# Altium PCB SIC18102  V1 8电极6005_20180920.PcbDoc (part 2 of 3)
Units mm, origin at the board's own origin, x right, y up, seen from the top; angles counter-clockwise.
Board outline 116 x 63 mm, 2 copper layers (Top Layer, Bottom Layer); 179 components, 127 nets, 387 pads, 294 vias.
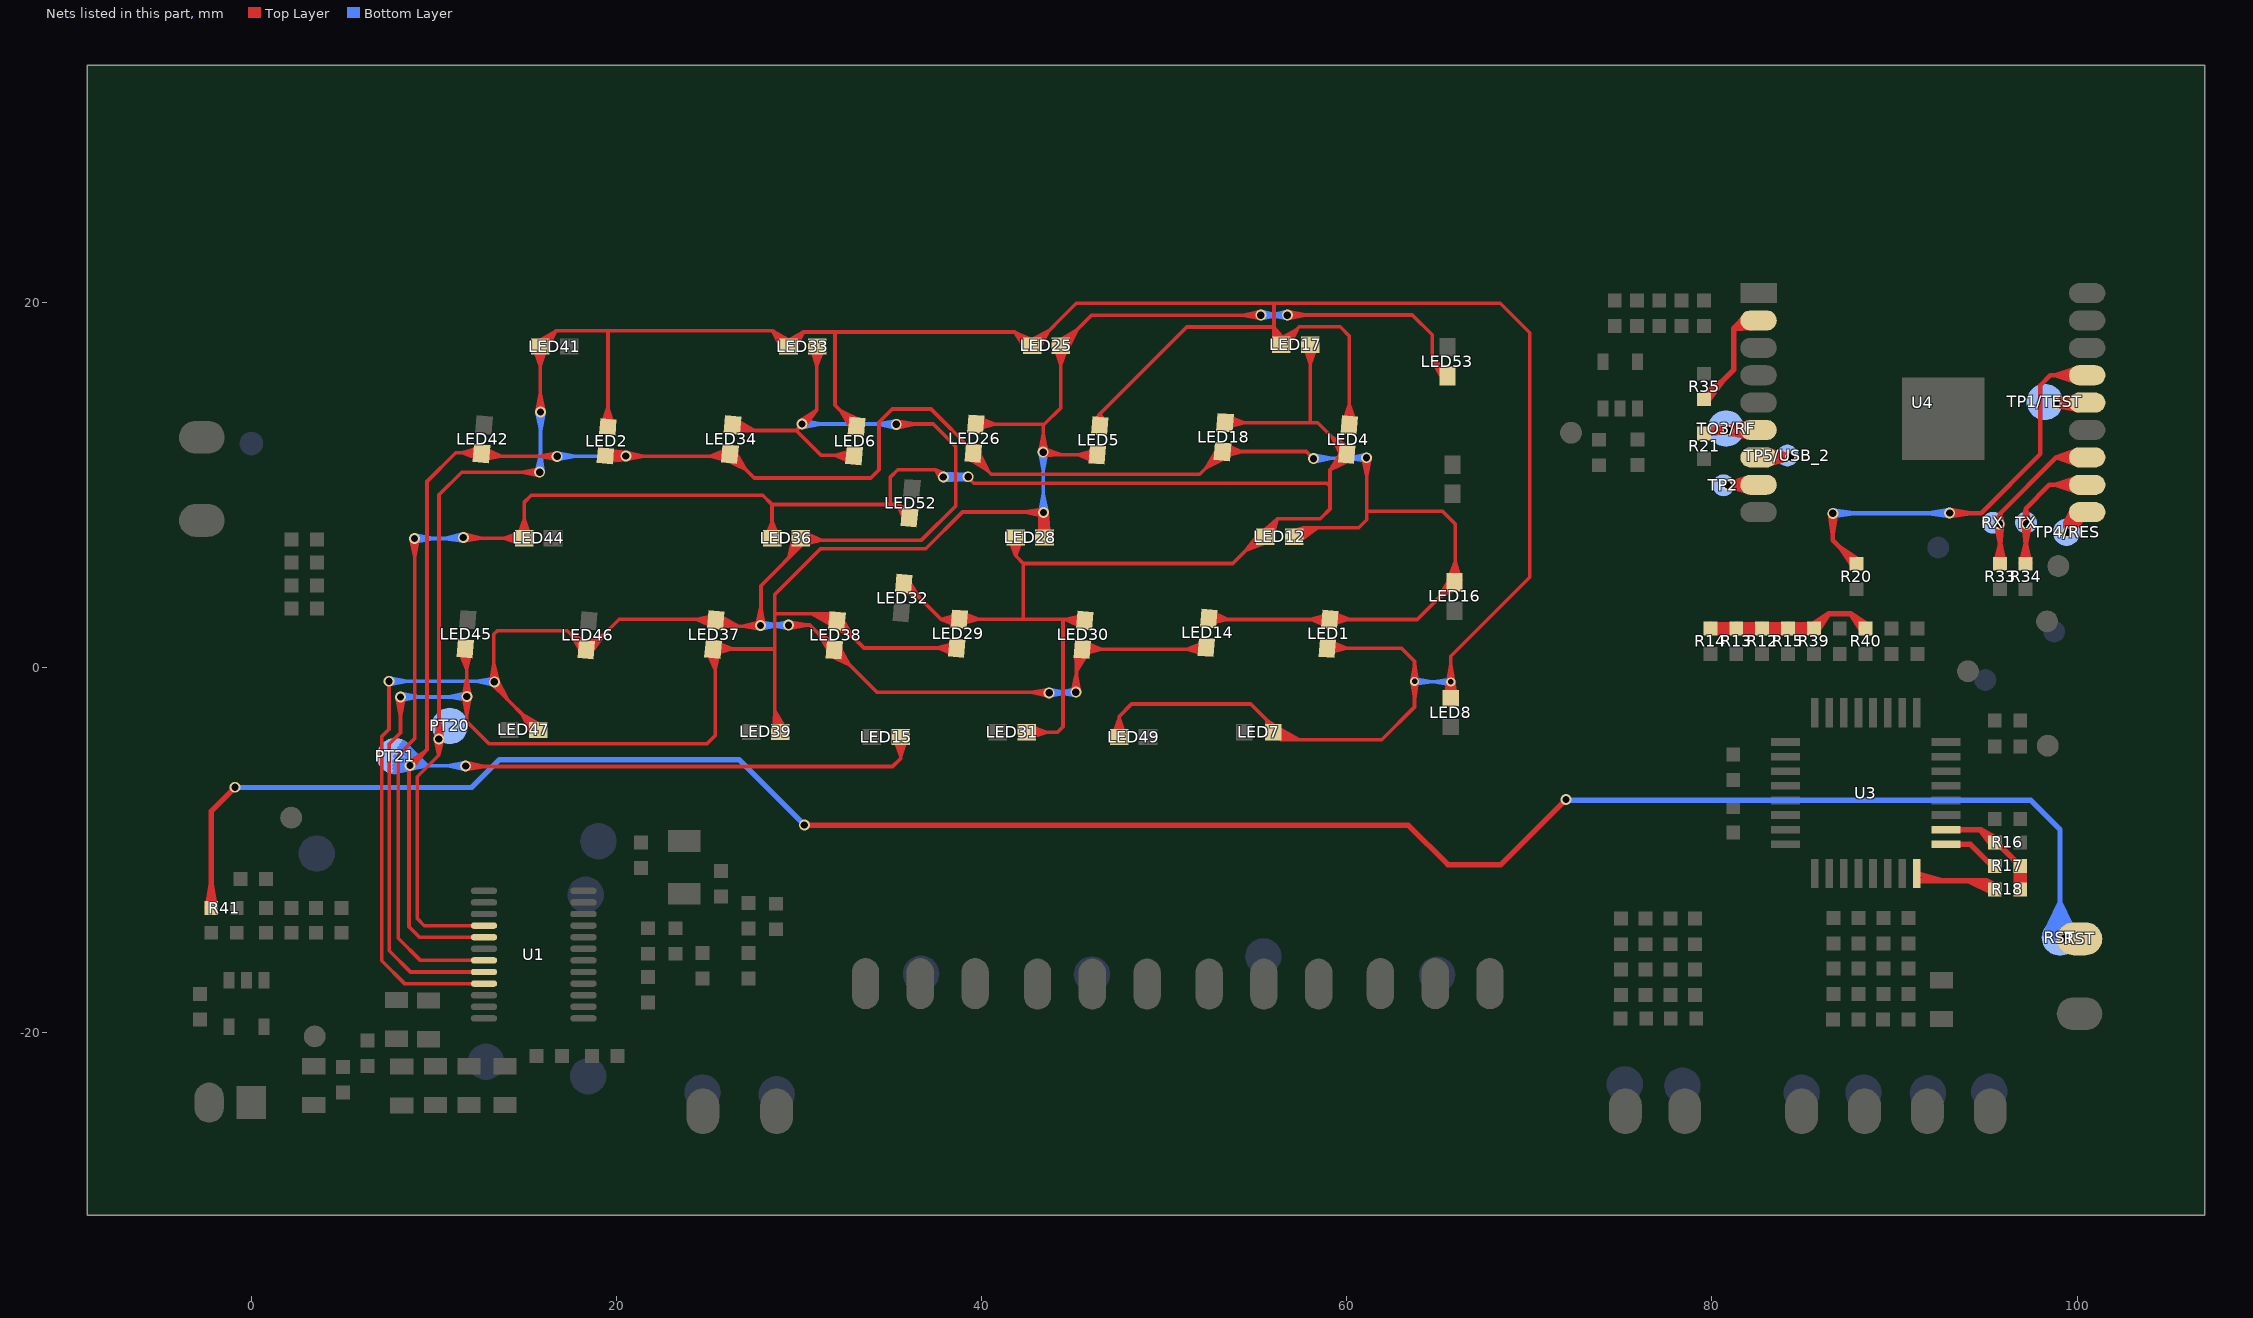
[diagram p2: the nets of this part, all layers, seen from the top]

## Via types
v1: diameter 0.6, hole 0.4, Top Layer to Bottom Layer, 288 vias
v2: diameter 0.8, hole 0.5, Top Layer to Bottom Layer, 4 vias
v3: diameter 0.5, hole 0.3, Top Layer to Bottom Layer, 2 vias

## Nets (pads, with @x,y where several pads share a name; then routed paths per layer and width w, separated by ;. In a path a pad name is that pad's centre, name@x,y a point inside that pad or via, vN(x,y) a via of type N, cw(c..) or ccw(c..) an arc to the next point about the centre after c; other vN are vias at no path point) (continued)
NetR12_2: R12.2 R13.2 R14.2 R15.2 R39.2 R40.1 | length 71.4
  Top Layer w0.3: R14.2@79.892,1.899 R13.2@81.179,1.922 ; R14.2@79.892,2.359 R13.2@81.179,2.336 ; R14.2@79.929,1.899 81.19,2.129 R14.2@79.929,2.359 ; R14.2@79.966,1.905 R13.2@81.179,2.336 ; R14.2@79.966,2.353 R13.2@81.179,1.922 ; R13.2@81.306,1.899 80.046,2.129 R13.2@81.306,2.359 ; R13.2@81.31,1.899 R12.2@82.597,1.922 ; R13.2@81.31,2.359 R12.2@82.597,2.336 ; R13.2@81.347,1.899 82.608,2.129 R13.2@81.347,2.359 ; R13.2@81.384,1.905 R12.2@82.597,2.336 ; R13.2@81.384,2.353 R12.2@82.597,1.922 ; R12.2@82.724,1.899 81.463,2.129 R12.2@82.724,2.359 ; R12.2@82.765,1.899 84.025,2.129 R12.2@82.765,2.359 ; R15.2@84.105,1.905 R12.2@82.892,2.336 ; R15.2@84.105,2.353 R12.2@82.892,1.922 ; R15.2@84.142,1.899 82.881,2.129 R15.2@84.142,2.359 ; R15.2@84.146,1.899 R39.2@85.433,1.922 ; R15.2@84.146,2.359 R39.2@85.433,2.336 ; R15.2@84.179,1.899 R12.2@82.892,1.922 ; R15.2@84.179,2.359 R12.2@82.892,2.336 ; R15.2@84.22,1.905 R39.2@85.433,2.336 ; R15.2@84.22,2.353 R39.2@85.433,1.922 ; R39.2@85.434,2.308 86.391,2.94 ; R39.2@85.56,1.899 R15.2@84.299,2.129 ; R39.2@85.56,2.359 R15.2@84.299,2.129 ; R39.2@85.759,1.983 86.391,2.94 ; R40.1@88.237,1.983 87.605,2.94 ; R40.1@88.562,2.308 87.605,2.94 ; R14.2@79.909,2.129 R39.2@85.58,2.129 ; R14.2@79.909,2.129 R13.2@81.179,1.922 ; R14.2@79.909,2.129 R13.2@81.179,2.336 ; R12.2@82.597,1.922 R13.2@81.327,2.129 R12.2@82.597,2.336 ; R12.2@82.892,1.922 R15.2@84.162,2.129 ; R12.2@82.892,2.336 R15.2@84.162,2.129 ; R15.2@84.162,2.129 R39.2@85.433,1.922 ; R15.2@84.162,2.129 R39.2@85.433,2.336 ; R15.2@84.162,2.129 R39.2@85.443,2.129 ; R15.2@84.299,2.129 R39.2@85.58,2.129 ; R39.2@85.443,2.129 84.183,2.359 R39.2@85.443,2.129 ; R39.2@85.443,2.129 84.183,1.899 R39.2@85.443,2.129 ; R39.2@85.58,2.129 86.391,2.94 ; 86.391,2.94 87.605,2.94 ; 87.605,2.94 R40.1@88.416,2.129 87.605,2.94
NetR14_1: 
NetR16_1: R16.1 R17.1 R18.2 U3.26 | length 24.4
  Top Layer w0.3: U3.26@92.82,-8.88 94.7,-8.88 ; U3.26@93.41,-8.88 94.52,-8.88 ; R16.1@95.315,-9.727 94.7,-8.88 ; R16.1@95.39,-9.57 94.7,-8.88 ; R16.1@95.619,-9.382 94.7,-8.88 ; R18.2@96.653,-12.166 R17.1@96.653,-10.879 ; R18.2@96.653,-12.124 R17.1@96.883,-10.864 ; R18.2@96.661,-12.084 R17.1@97.113,-10.879 ; R18.2@97.106,-12.084 R17.1@96.653,-10.879 ; R18.2@97.113,-12.166 R17.1@97.113,-10.879 ; R18.2@97.113,-12.124 R17.1@96.883,-10.864 ; 94.7,-8.88 R16.1@95.486,-9.571 95.596,-9.571 R17.1@96.883,-10.858 R18.2@96.883,-12.145 ; R17.1@96.653,-10.879 96.883,-12.139 R17.1@97.113,-10.879 ; R17.1@96.653,-10.879 R18.2@96.883,-12.145 ; R18.2@96.883,-12.145 R17.1@96.883,-10.864 ; R18.2@96.883,-12.145 R17.1@97.113,-10.879
NetR17_2: R17.2 U3.25 | length 4.1
  Top Layer w0.3: U3.25@92.82,-9.68 94.15,-9.68 ; U3.25@93.41,-9.68 94.15,-9.68 ; R17.2@95.354,-10.99 R17.2@95.486,-10.858 95.328,-10.858 94.15,-9.68
NetR18_1: R18.1 U3.24 | length 15
  Top Layer w0.3: U3.24@91.22,-11.28 92.604,-11.67 ; U3.24@91.235,-11.355 U3.24@91.235,-10.835 ; U3.24@91.32,-11.67 95.011,-11.67 ; R18.1@95.399,-12.359 94.01,-11.67 ; R18.1@95.54,-11.921 94.01,-11.67 ; 94.01,-11.67 R18.1@95.486,-12.145 ; 95.011,-11.67 R18.1@95.486,-12.145 ; 95.011,-11.67 95.297,-12.278 95.011,-11.67 ; 95.011,-11.67 95.619,-11.956 95.011,-11.67 ; 95.011,-11.67 R18.1@95.486,-12.145 ; 95.011,-11.67 R18.1@95.486,-12.145
NetR20_1: R20.1 U4.15 | length 45.6
  Top Layer w0.25: v1@86.446,8.437 86.62,7.298 ; v1@86.794,8.437 86.62,7.298 ; R20.1@87.712,5.521 86.999,6.595 ; R20.1@88.072,5.881 86.999,6.595 ; v1@92.94,8.45 94.74,8.45 97.99,11.7 97.99,15.47 98.53,16.01 U4.15@100.55,16.01 ; v1(93.02,8.46) 94.172,8.45 ; v1@93.032,8.285 94.172,8.45 ; v1@93.035,8.634 94.172,8.45 ; U4.15@100.031,15.591 98.8,16.01 ; U4.15@100.031,16.429 98.8,16.01 ; U4.15@100.088,15.835 98.8,16.01 ; U4.15@100.088,16.185 98.8,16.01 ; U4.15@100.1,16.01 98.8,16.01 ; 86.62,7.298 v1(86.62,8.45) 86.62,6.973 R20.1@87.91,5.683 86.999,6.595
  Bottom Layer w0.25: v1(86.62,8.45) 87.772,8.46 ; v1@86.632,8.625 87.772,8.46 ; v1@86.635,8.276 87.772,8.46 ; v1@86.73,8.46 v1(93.02,8.46) ; v1@93.007,8.286 91.868,8.46 v1@93.007,8.634
NetR21_2: R21.2 TO3/RF.1 U4.6 | length 19.3
  Top Layer w0.4: 81.205,13.01 R21.2@79.57,12.83 ; U4.6@82.472,13.01 v1(80.87,13) ; U4.6@82.55,13.01 R21.2@79.75,13.01 ; R21.2@79.57,12.83 R21.2@79.75,13.01 ; R21.2@79.57,12.83 v1(80.87,13) ; R21.2@79.75,13.01 v1(80.87,13) ; 80.35,13.01 82.065,12.662 v1(80.87,13) ; 80.35,13.01 82.065,13.358 v1(80.87,13) ; 80.35,13.01 82.1,13.01 v1(80.87,13) ; 80.35,13.01 v1(80.87,13) ; 80.35,13.01 v1(80.87,13) ; 80.35,13.01 v1(80.87,13)
NetR33_1: R33.1 RX.1 U4.12 | length 22.4
  Top Layer w0.25: R33.1@95.523,5.712 95.778,6.814 R33.1@96.032,5.712 ; v1@95.556,7.85 95.778,6.717 ; v1@95.56,7.912 95.778,8.428 ; R33.1@95.778,5.683 95.778,8.428 ; v1@95.905,7.883 95.778,8.428 ; v1@95.905,7.864 95.778,6.717 ; U4.12@100.027,11.091 98.86,11.51 ; U4.12@100.027,11.929 98.86,11.51 ; U4.12@100.088,11.335 98.86,11.51 ; U4.12@100.088,11.685 98.86,11.51 ; U4.12@100.1,11.51 98.86,11.51 ; U4.12@100.55,11.51 98.86,11.51 ; 95.778,6.717 v1(95.73,7.87) 95.778,8.428 ; 95.778,8.428 98.86,11.51
NetR34_2: R34.2 TX.1 U4.11 | length 21.7
  Top Layer w0.25: R34.2@96.92,5.712 97.175,6.814 R34.2@97.429,5.712 ; v1@97.065,7.867 97.175,6.715 ; v1@97.065,7.875 97.175,8.705 ; R34.2@97.175,5.683 97.175,8.705 ; v1@97.412,7.902 97.175,8.705 ; v1@97.413,7.847 97.175,6.715 ; U4.11@100.031,9.591 98.8,10.01 ; U4.11@100.031,10.429 98.8,10.01 ; U4.11@100.088,9.835 98.8,10.01 ; U4.11@100.088,10.185 98.8,10.01 ; U4.11@100.1,10.01 98.8,10.01 ; U4.11@100.55,10.01 98.48,10.01 97.175,8.705 ; 97.175,6.715 v1(97.24,7.87) 97.175,8.705
NetR35_2: R35.2 U4.2 | length 12
  Top Layer w0.3: R35.2@79.42,14.869 80.587,15.71 R35.2@79.746,14.543 ; R35.2@79.57,14.693 81.18,16.303 81.18,18.56 ; U4.2@81.857,19.328 81.18,18.56 ; U4.2@82.1,19.01 81.18,18.56 ; U4.2@82.202,18.623 81.18,18.56 ; U4.2@82.48,19.01 81.63,19.01 81.18,18.56
NetR41_1: R41.1 RST.1 | length 143.2
  Top Layer w0.3: R41.1@-2.426,-13.151 -2.196,-11.891 R41.1@-1.966,-13.151 ; R41.1@-2.196,-13.172 -2.196,-7.862 v1(-0.891,-6.557) ; v1(30.29,-8.62) 31.592,-8.64 ; v1@30.31,-8.71 30.38,-8.64 63.37,-8.64 65.53,-10.8 68.436,-10.8 v1(72.009,-7.227) 70.971,-8.265
  Bottom Layer w0.3: v1@-0.93,-6.57 12.07,-6.57 13.6,-5.04 26.71,-5.04 v1(30.29,-8.62) 29.252,-7.582 ; v1(-0.891,-6.557) 0.411,-6.57 ; v1@71.92,-7.27 97.46,-7.27 99.06,-8.87 RST.1@99.06,-14.79 ; v1(72.009,-7.227) 73.312,-7.27 ; RST.1@98.232,-14.6 99.06,-12.89 ; RST.1@98.516,-14.71 99.06,-12.89 ; RST.1@98.811,-14.774 99.06,-12.89 ; 99.06,-13.453 v1(99.319,-14.827) ; 99.145,-13.534 v1(99.319,-14.827) ; 99.22,-13.424 v1(99.319,-14.827) ; RST.1@99.309,-14.774 99.06,-12.89 ; RST.1@99.604,-14.71 99.06,-12.89 ; RST.1@99.888,-14.6 99.06,-12.89
NetTP1_1: TP1/TEST.1 U4.14 | length 5.5
  Top Layer w0.5: U4.14@100.055,14.807 v1(98.84,14.47) ; U4.14@100.074,14.211 v1(98.84,14.47) ; U4.14@100.1,14.51 v1(98.84,14.47) ; U4.14@100.55,14.51 100.51,14.47 v1(98.84,14.47)
NetTP2_1: TP2.1 U4.8 | length 5.5
  Top Layer w0.4: U4.8@82.048,10.356 v1(80.85,10) ; U4.8@82.054,9.663 v1(80.85,10) ; U4.8@82.1,10.01 v1(80.85,10) ; U4.8@82.55,10.01 82.54,10 v1(80.85,10)
NetTP4_1: TP4/RES.1 U4.10 | length 11.4
  Top Layer w0.5: U4.10@100.55,8.51 U4.10@100.07,8.51 ; v1(99.48,7.41) 99.48,7.92 ; v1(99.48,7.41) 100.266,8.26 99.48,7.92 ; v1(99.48,7.41) 99.48,7.92 ; v1(99.48,7.41) U4.10@100.07,8.51 ; v1(99.48,7.41) 99.48,7.92 ; v1(99.48,7.41) 99.858,8.688 99.48,7.92 ; v1(99.48,7.41) 99.48,7.92 ; v1(99.48,7.41) 100.1,8.51 99.48,7.92 ; v1(99.48,7.41) 99.48,7.92 ; 99.48,7.92 U4.10@100.07,8.51
NetTP5_1: TP5/USB_2.1 U4.7 | length 5.6
  Top Layer w0.4: U4.7@82.55,11.51 82.57,11.53 v1(84.29,11.53) ; U4.7@83,11.51 v1(84.29,11.53) ; U4.7@83.042,11.857 v1(84.29,11.53) ; U4.7@83.053,11.164 v1(84.29,11.53)
PT20: LED1.K LED2.A LED4.A LED5.A LED6.A LED7.A LED8.A LED17.K LED25.K LED33.K LED41.K LED49.K PT20.1 U1.16 | length 316.4
  Top Layer w0.2: v1@10.071,-3.932 10.27,-4.8 ; v1@10.071,-3.888 10.28,-2.908 ; v1@10.28,-4.07 10.28,9.46 11.52,10.7 v1(15.79,10.7) ; v1@10.469,-3.932 10.27,-4.8 ; v1@10.469,-3.892 10.28,-2.908 ; 11.415,-14.135 U1.16@12.19,-14.135 ; U1.16@12.74,-14.135 9.475,-14.135 9.09,-13.75 9.09,-5.98 10.27,-4.8 ; LED41.K@15.479,17.523 15.818,16.536 ; v1@15.641,14.016 15.818,15.002 ; LED41.K@15.666,17.849 16.678,18.44 ; LED41.K@15.674,17.57 15.818,16.536 ; v1@15.77,10.501 14.788,10.7 v1@15.77,10.899 ; LED41.K@15.782,17.685 16.678,18.44 ; v1@15.818,13.932 LED41.K@15.818,17.58 ; v1(15.84,14) 15.818,15.002 ; LED41.K@15.882,17.58 16.678,18.44 ; LED41.K@15.963,17.57 15.818,16.536 ; LED41.K@15.994,17.489 16.678,18.44 ; v1@16.039,14.024 15.818,15.002 ; LED41.K@16.158,17.523 15.818,16.536 ; LED41.K@16.166,17.386 16.678,18.44 ; LED2.A@19.19,13.237 19.53,14.222 ; LED2.A@19.386,13.19 19.53,14.222 ; 19.48,18.44 19.53,18.39 LED2.A@19.53,13.18 ; LED2.A@19.526,13.18 19.53,14.222 ; LED2.A@19.665,13.189 19.53,14.222 ; LED2.A@19.861,13.234 19.53,14.222 ; LED33.K@29.072,17.386 28.56,18.44 ; LED33.K@29.245,17.489 28.56,18.44 ; LED33.K@29.27,17.851 30.22,18.38 ; LED33.K@29.356,17.58 28.56,18.44 ; LED33.K@29.384,17.685 30.22,18.38 ; LED33.K@29.456,17.685 28.56,18.44 ; LED33.K@29.483,17.58 30.22,18.38 ; LED33.K@29.572,17.849 28.56,18.44 ; LED33.K@29.596,17.489 30.22,18.38 ; LED33.K@29.771,17.39 30.22,18.38 ; LED33.K@29.813,17.973 LED33.K@29.42,17.58 ; LED6.A@32.885,13.043 32.313,14.03 ; LED6.A@33.049,13.159 32.313,14.03 ; LED6.A@33.148,13.196 31.97,14.373 31.97,18.38 ; LED6.A@33.153,13.259 32.313,14.03 ; LED6.A@33.244,13.371 32.313,14.03 ; LED6.A@33.345,13.545 32.313,14.03 ; LED25.K@42.435,17.394 41.806,18.38 ; LED25.K@42.594,17.516 41.806,18.38 ; LED25.K@42.62,17.899 43.683,18.453 ; LED25.K@42.662,17.524 LED25.K@42.758,17.62 42.566,17.62 41.806,18.38 ; LED25.K@42.695,17.62 41.806,18.38 ; LED25.K@42.717,17.643 42.873,17.643 45.18,19.95 68.41,19.95 70.02,18.34 70.02,4.94 65.695,0.615 LED8.A@65.695,-1.68 ; LED25.K@42.728,17.73 43.683,18.453 ; LED25.K@42.782,17.735 41.806,18.38 ; LED25.K@42.822,17.62 43.683,18.453 ; LED25.K@42.878,17.912 41.806,18.38 ; LED25.K@42.928,17.522 43.683,18.453 ; LED25.K@43.095,17.409 43.683,18.453 ; LED5.A@46.145,13.39 46.47,13.89 ; LED5.A@46.332,13.309 46.47,13.89 ; LED5.A@46.47,13.23 46.47,13.89 ; LED5.A@46.476,13.293 46.47,13.89 ; LED5.A@46.619,13.312 46.47,13.89 ; LED5.A@46.804,13.396 46.47,13.89 ; LED49.K@47.189,-3.753 47.528,-2.765 ; LED49.K@47.384,-3.8 47.528,-2.765 ; LED49.K@47.528,-3.81 47.528,-2.682 48.21,-2 54.733,-2 55.61,-2.877 ; LED49.K@47.673,-3.8 47.528,-2.765 ; LED49.K@47.868,-3.753 47.528,-2.765 ; LED7.A@55.632,-3.629 55.61,-2.877 ; LED7.A@55.831,-3.596 55.61,-2.877 ; LED7.A@55.916,-3.879 57.379,-3.96 ; LED7.A@55.941,-3.68 57.379,-3.96 ; LED7.A@55.965,-3.54 55.61,-2.877 ; LED7.A@55.975,-3.54 57.379,-3.96 ; 56.012,19.92 56.012,18.65 ; LED17.K@56.015,17.621 56.012,18.65 ; LED7.A@56.024,-3.404 57.379,-3.96 ; LED7.A@56.085,-3.46 55.61,-2.877 ; LED7.A@56.112,-3.224 57.379,-3.96 ; LED17.K@56.216,17.642 56.012,18.65 ; LED7.A@56.223,-3.312 55.61,-2.877 ; LED17.K@56.266,17.948 57.287,18.549 ; LED17.K@56.355,17.68 56.012,18.65 ; LED17.K@56.382,17.785 57.287,18.549 ; LED17.K@56.482,17.68 57.287,18.549 ; LED17.K@56.487,17.738 56.012,18.65 ; LED17.K@56.594,17.588 57.287,18.549 ; LED17.K@56.656,17.848 56.012,18.65 ; LED17.K@56.766,17.485 57.287,18.549 ; LED1.K@58.93,1.06 63,1.06 63.71,0.35 v3(63.71,-0.76) ; LED1.K@58.936,1.123 59.976,1.06 ; LED1.K@58.937,0.979 59.976,1.06 ; LED1.K@58.954,1.267 59.976,1.06 ; LED1.K@58.972,0.781 59.976,1.06 ; LED1.K@59.013,1.459 59.976,1.06 ; LED4.A@59.803,13.394 60.138,14.386 ; LED4.A@59.999,13.348 60.138,14.386 ; LED4.A@60.138,13.276 60.138,18.162 59.64,18.66 57.398,18.66 LED17.K@56.418,17.68 56.012,18.086 56.012,18.65 ; LED4.A@60.143,13.339 60.138,14.386 ; LED4.A@60.287,13.35 60.138,14.386 ; LED4.A@60.483,13.397 60.138,14.386 ; v3@63.56,-0.772 63.71,-1.712 ; v3@63.56,-0.748 63.71,0.192 v3@63.86,-0.748 ; v3@63.86,-0.772 63.71,-1.712 ; v3@65.541,-0.8 LED8.A@65.695,-1.68 ; v3@65.54,-0.777 LED8.A@65.555,-1.671 ; v3@65.541,-0.774 65.695,0.165 ; v3@65.545,-0.823 LED8.A@65.835,-1.671 ; v3@65.546,-0.743 LED8.A@65.36,-1.624 ; v3@65.556,-0.854 LED8.A@66.03,-1.624 ; v3@65.824,-0.853 LED8.A@65.36,-1.624 ; v3@65.833,-0.742 LED8.A@66.03,-1.624 ; v3@65.836,-0.822 LED8.A@65.555,-1.671 ; v3@65.84,-0.798 LED8.A@65.695,-1.68 ; v3@65.84,-0.776 65.695,0.165 ; v3@65.84,-0.775 LED8.A@65.835,-1.671 ; 10.27,-4.8 v1(10.27,-3.91) ; 10.27,-4.8 v1(10.27,-3.91) ; v1(10.27,-3.91) 10.28,-2.908 ; 15.818,16.536 LED41.K@15.818,17.58 ; LED41.K@15.818,17.58 16.678,18.44 ; 16.678,18.44 28.56,18.44 ; 28.56,18.44 LED33.K@29.42,17.58 ; LED33.K@29.42,17.58 30.22,18.38 ; 30.22,18.38 31.97,18.38 ; 31.97,18.38 41.806,18.38 ; 46.47,13.89 51.23,18.65 56.012,18.65 ; 55.61,-2.877 55.61,-3.18 LED7.A@55.97,-3.54 56.39,-3.96 61.91,-3.96 63.71,-2.16 v3(63.71,-0.76) ; 63.71,-1.712 v3(63.71,-0.76) ; LED8.A@65.36,-1.624 v3@65.695,-0.64 ; LED8.A@65.36,-1.624 v3(65.69,-0.787) ; LED8.A@65.555,-1.671 v3@65.695,-0.64 ; LED8.A@65.555,-1.671 v3(65.69,-0.787) ; v3(65.69,-0.787) 65.695,0.165 ; v3(65.69,-0.787) LED8.A@65.695,-1.68 ; v3(65.69,-0.787) LED8.A@66.03,-1.624 ; v3(65.69,-0.787) LED8.A@65.835,-1.671 ; v3@65.695,-0.64 LED8.A@66.03,-1.624 ; v3@65.695,-0.64 LED8.A@65.835,-1.671
  Bottom Layer w0.2: v1@15.592,10.73 15.84,11.704 ; v1@15.641,13.98 15.84,12.998 v1@16.039,13.98 ; v1(15.84,14) 15.84,10.75 v1(15.79,10.7) 15.84,11.704 ; v1@15.99,10.71 15.84,11.704 ; v3@63.66,-0.787 v3(65.69,-0.787) 64.738,-0.787 ; v3(63.71,-0.76) 64.662,-0.787 ; v3@63.718,-0.91 64.662,-0.787 ; v3@63.726,-0.611 64.662,-0.787 ; v3@65.678,-0.936 64.738,-0.787 ; v3@65.678,-0.637 64.738,-0.787
PT21: LED1.A LED2.K LED12.A LED14.A LED15.A LED16.A LED18.K LED26.K LED34.K LED42.K PT21.1 U1.17 | length 331.8
  Top Layer w0.2: v1@8.567,-5.202 9.533,-4.577 ; v1(8.69,-5.36) 9.533,-4.577 ; v1@8.838,-5.494 9.533,-4.577 ; 11.415,-14.77 U1.17@12.19,-14.77 ; v1@11.72,-5.42 35.12,-5.42 35.562,-4.978 LED15.A@35.562,-3.81 35.562,-4.855 ; v1(11.74,-5.39) 12.743,-5.42 ; v1@11.754,-5.59 12.743,-5.42 ; v1@11.766,-5.192 12.743,-5.42 ; LED42.K@12.528,11.378 11.556,11.77 ; LED42.K@12.564,12.057 11.556,11.77 ; LED42.K@12.585,11.571 11.556,11.77 ; LED42.K@12.592,11.57 13.674,11.57 ; LED42.K@12.6,11.859 11.556,11.77 ; LED42.K@12.611,11.37 13.674,11.57 ; LED42.K@12.62,11.77 11.198,11.77 9.62,10.192 9.62,-4.49 8.63,-5.48 8.63,-14.19 9.21,-14.77 U1.17@12.74,-14.77 ; LED42.K@12.631,11.856 13.674,11.57 ; LED42.K@12.702,12.044 13.674,11.57 ; v1@16.73,11.371 15.748,11.57 ; v1@16.73,11.769 15.748,11.57 ; v1(16.75,11.57) 15.748,11.57 ; v1@16.8,11.57 12.747,11.57 LED42.K@12.602,11.714 ; LED2.K@19.392,11.604 19.407,11.59 v1(20.51,11.59) ; LED2.K@19.397,11.604 v1@20.438,11.59 ; LED2.K@19.404,11.464 v1@20.438,11.59 ; LED2.K@19.408,11.744 v1@20.438,11.59 ; LED2.K@19.448,11.268 v1@20.438,11.59 ; LED2.K@19.457,11.939 v1@20.438,11.59 ; v1@20.389,11.567 26.075,11.567 LED34.K@26.212,11.704 27.537,10.38 33.93,10.38 34.38,10.83 34.38,13.44 35.1,14.16 37.227,14.16 LED26.K@39.54,11.847 ; v1@20.429,11.407 LED2.K@19.538,11.91 ; v1@20.434,11.775 LED2.K@19.533,11.296 ; v1@20.463,11.396 LED2.K@19.514,11.728 ; v1@20.468,11.786 LED2.K@19.512,11.477 ; v1@20.488,11.391 LED2.K@19.508,11.603 ; v1@20.49,11.391 19.508,11.59 v1@20.49,11.789 ; v1@20.493,11.789 LED2.K@19.508,11.603 ; v1@20.513,11.39 LED2.K@19.512,11.477 ; v1@20.518,11.79 LED2.K@19.514,11.728 ; v1@20.525,11.391 21.512,11.567 ; v1@20.535,11.788 21.512,11.567 ; v1@20.549,11.394 LED2.K@19.533,11.296 ; v1@20.554,11.785 LED2.K@19.538,11.91 ; LED34.K@26.015,11.355 27.047,10.87 ; LED34.K@26.116,11.529 27.047,10.87 ; LED34.K@26.128,11.977 25.14,11.567 ; LED34.K@26.175,11.298 25.14,11.567 ; LED34.K@26.187,11.784 25.14,11.567 ; LED34.K@26.207,11.497 25.14,11.567 ; LED34.K@26.311,11.741 27.047,10.87 ; LED34.K@26.475,11.857 27.047,10.87 ; LED15.A@35.222,-3.867 35.562,-4.855 ; LED15.A@35.417,-3.82 35.562,-4.855 ; LED15.A@35.706,-3.82 35.562,-4.855 ; LED15.A@35.901,-3.867 35.562,-4.855 ; LED26.K@39.312,11.424 40.325,10.791 ; LED26.K@39.432,11.585 40.325,10.791 ; LED26.K@39.534,11.687 40.325,10.791 ; LED26.K@39.648,11.776 40.325,10.791 ; LED26.K@39.73,11.726 39.73,11.386 40.526,10.59 51.95,10.59 LED18.K@53.19,11.83 57.784,11.83 v1(58.174,11.44) ; LED26.K@39.823,11.875 40.325,10.791 ; LED14.A@52.439,2.609 53.489,2.636 ; LED14.A@52.44,2.69 52.494,2.636 LED1.A@59.068,2.636 63.851,2.636 LED16.A@65.899,4.684 ; LED14.A@52.446,2.753 53.489,2.636 ; LED14.A@52.464,2.409 53.489,2.636 ; LED14.A@52.472,2.895 53.489,2.636 ; LED14.A@52.54,3.085 53.489,2.636 ; LED18.K@52.916,11.982 52.297,10.937 ; LED18.K@53.08,11.866 52.297,10.937 ; LED18.K@53.184,11.767 52.297,10.937 ; LED18.K@53.196,11.893 54.236,11.83 ; LED18.K@53.197,11.749 54.236,11.83 ; LED18.K@53.214,12.037 54.236,11.83 ; LED18.K@53.232,11.551 54.236,11.83 ; LED18.K@53.273,12.229 54.236,11.83 ; LED18.K@53.277,11.656 52.297,10.937 ; LED18.K@53.382,11.484 52.297,10.937 ; LED12.A@57.099,7.504 58.373,7.65 ; LED12.A@57.12,7.17 57.6,7.65 ; LED12.A@57.137,7.307 58.373,7.65 ; LED12.A@57.245,7.039 58.373,7.65 ; LED12.A@57.354,6.871 58.373,7.65 ; LED1.A@58.985,2.237 58.022,2.636 ; LED1.A@59.026,2.915 58.022,2.636 ; LED1.A@59.044,2.429 58.022,2.636 ; LED1.A@59.061,2.717 58.022,2.636 ; LED1.A@59.062,2.572 58.022,2.636 ; LED1.A@59.073,2.699 60.114,2.636 ; LED1.A@59.075,2.554 60.114,2.636 ; LED1.A@59.092,2.842 60.114,2.636 ; LED1.A@59.11,2.356 60.114,2.636 ; LED1.A@59.151,3.035 60.114,2.636 ; v1@60.881,11.468 61.09,10.488 ; v1(61.08,11.49) 61.09,10.488 ; v1@61.09,11.45 61.09,9.06 61.09,8.59 ; v1@61.279,11.472 61.09,10.488 ; LED16.A@65.562,4.817 65.94,5.793 ; LED16.A@65.631,4.836 65.03,3.815 ; LED16.A@65.755,4.763 65.94,5.793 ; LED16.A@65.794,4.72 65.03,3.815 ; LED16.A@65.899,4.62 65.03,3.815 ; LED16.A@65.899,4.747 65.94,5.793 ; LED16.A@65.94,4.64 65.94,7.86 65.24,8.56 61.12,8.56 61.09,8.59 ; LED16.A@65.991,4.508 65.03,3.815 ; LED16.A@66.043,4.751 65.94,5.793 ; LED16.A@66.094,4.336 65.03,3.815 ; LED16.A@66.241,4.79 65.94,5.793 ; 11.556,11.77 LED42.K@12.602,11.714 ; LED42.K@12.602,11.714 13.674,11.57 ; LED2.K@19.508,11.603 v1(20.51,11.59) ; LED2.K@19.512,11.477 v1(20.51,11.59) ; LED2.K@19.514,11.728 v1(20.51,11.59) ; LED2.K@19.533,11.296 v1(20.51,11.59) ; LED2.K@19.538,11.91 v1(20.51,11.59) ; v1(20.51,11.59) 21.512,11.567 ; 25.14,11.567 26.207,11.641 27.047,10.87 ; LED12.A@57.184,7.17 57.6,7.65 ; LED12.A@57.184,7.17 58.373,7.65 ; LED12.A@57.184,7.17 57.6,7.65 ; 57.6,7.65 60.65,7.65 61.09,8.09 61.09,8.59 ; 57.6,7.65 56.994,7.458 57.6,7.65 ; 57.6,7.65 57.495,7.023 57.6,7.65 ; 57.6,7.65 57.086,7.276 57.6,7.65 ; 57.6,7.65 57.303,7.088 57.6,7.65
  Bottom Layer w0.2: PT21.1@7.978,-4.57 9.652,-5.38 ; PT21.1@8.076,-4.394 9.652,-5.38 ; PT21.1@8.192,-4.229 9.652,-5.38 ; PT21.1@8.328,-4.075 9.652,-5.38 ; PT21.1@8.5,-5.34 8.54,-5.38 v1@11.71,-5.38 ; PT21.1@8.567,-5.518 PT21.1@7.87,-4.85 ; PT21.1@8.589,-5.188 PT21.1@7.83,-5.749 ; v1@8.621,-5.548 PT21.1@7.808,-5.144 ; PT21.1@8.628,-5.17 PT21.1@7.8,-5.547 ; v1@8.664,-5.558 PT21.1@7.793,-5.344 ; PT21.1@8.671,-5.161 PT21.1@7.793,-5.344 ; v1@8.706,-5.559 9.692,-5.38 ; v1@8.709,-5.559 PT21.1@7.8,-5.547 ; PT21.1@8.714,-5.161 9.692,-5.38 ; PT21.1@8.716,-5.162 PT21.1@7.808,-5.144 ; v1@8.753,-5.55 PT21.1@7.83,-5.749 ; PT21.1@8.777,-5.18 PT21.1@7.87,-4.85 ; v1@11.718,-5.589 10.738,-5.38 ; v1@11.722,-5.191 10.738,-5.38 ; v1(11.74,-5.39) 10.738,-5.38 ; v1(16.75,11.57) 20.49,11.57 v1(20.51,11.59) 19.508,11.57 ; v1@16.77,11.371 17.752,11.57 v1@16.77,11.769 ; v1@20.486,11.789 19.508,11.57 ; v1@20.494,11.391 19.508,11.57 ; v1@58.156,11.494 58.184,11.466 61.057,11.466 v1@61.08,11.489 ; v1(58.174,11.44) 59.176,11.466 ; v1@58.189,11.639 59.176,11.466 ; v1@58.199,11.242 59.176,11.466 ; v1@61.055,11.688 60.078,11.466 ; v1@61.065,11.291 60.078,11.466 ; v1(61.08,11.49) 60.078,11.466 ; PT21.1@7.793,-5.344 9.652,-5.38 ; PT21.1@7.793,-5.344 v1(8.69,-5.36) ; PT21.1@7.8,-5.547 9.652,-5.38 ; PT21.1@7.8,-5.547 v1(8.69,-5.36) ; PT21.1@7.808,-5.144 9.652,-5.38 ; PT21.1@7.808,-5.144 v1(8.69,-5.36) ; PT21.1@7.83,-5.749 9.652,-5.38 ; PT21.1@7.83,-5.749 v1(8.69,-5.36) ; PT21.1@7.87,-4.85 9.652,-5.38 ; PT21.1@7.87,-4.85 v1(8.69,-5.36) ; v1(8.69,-5.36) 9.692,-5.38 ; v1(8.69,-5.36) 9.652,-5.38 ; v1(8.69,-5.36) 9.652,-5.38 ; v1(8.69,-5.36) 9.652,-5.38 ; v1(8.69,-5.36) 9.652,-5.38 ; v1(8.69,-5.36) 9.652,-5.38 ; v1@8.707,-5.559 9.652,-5.38 ; v1@8.707,-5.559 9.652,-5.38 ; v1@8.707,-5.559 9.652,-5.38 ; v1@8.707,-5.559 9.652,-5.38 ; v1@8.707,-5.559 9.652,-5.38 ; PT21.1@8.715,-5.162 9.652,-5.38 ; PT21.1@8.715,-5.162 9.652,-5.38 ; PT21.1@8.715,-5.162 9.652,-5.38 ; PT21.1@8.715,-5.162 9.652,-5.38 ; PT21.1@8.715,-5.162 9.652,-5.38
PT22: 
PT23: LED4.K LED12.K LED17.A LED18.A LED28.K LED29.A LED30.A LED31.A LED32.A LED36.K LED44.K LED52.K U1.19 | length 251.6
  Top Layer w0.2: v1@8.741,7.05 8.94,6.068 v1@9.139,7.05 ; v1(8.94,7.07) 8.94,-3.9 8.04,-4.8 8.04,-14.82 9.26,-16.04 U1.19@12.74,-16.04 ; 11.415,-16.04 U1.19@12.19,-16.04 ; v1(11.61,7.12) 12.613,7.08 ; v1@11.622,6.92 12.613,7.08 ; v1@11.638,7.318 12.613,7.08 ; v1@11.65,7.08 LED44.K@14.938,7.08 14.938,9.041 15.333,9.436 28.013,9.436 28.518,8.931 ; LED44.K@14.599,7.137 14.938,8.124 ; LED44.K@14.794,7.09 14.938,8.124 ; LED44.K@14.818,6.74 13.83,7.08 ; LED44.K@14.818,7.42 13.83,7.08 ; LED44.K@14.865,6.936 13.83,7.08 ; LED44.K@14.865,7.224 13.83,7.08 ; LED44.K@14.875,7.08 13.83,7.08 ; LED44.K@15.083,7.09 14.938,8.124 ; LED44.K@15.278,7.137 14.938,8.124 ; LED36.K@28.18,7.146 28.518,7.983 ; LED36.K@28.374,7.092 28.518,7.983 ; LED36.K@28.518,7.08 28.518,7.983 ; LED36.K@28.662,7.092 28.518,7.983 ; LED36.K@28.857,7.146 28.518,7.983 ; LED32.A@35.556,4.236 36.61,3.81 ; LED32.A@35.648,4.415 36.61,3.81 ; LED32.A@35.732,4.532 36.61,3.81 ; LED52.K@35.758,8.093 35.409,8.931 ; LED32.A@35.831,4.638 36.61,3.81 ; LED32.A@35.885,4.535 37.774,2.646 ; LED52.K@35.935,8.191 35.409,8.931 ; LED32.A@35.989,4.762 36.61,3.81 ; LED52.K@36,8.27 36,8.34 35.409,8.931 ; LED52.K@36.046,8.283 35.409,8.931 ; LED52.K@36.14,8.392 35.409,8.931 ; LED52.K@36.241,8.567 35.409,8.931 ; v1@37.737,10.323 37.49,10.84 ; v1(37.9,10.44) 37.49,10.84 ; v1@37.93,10.44 37.89,10.44 37.49,10.84 ; v1@38.013,10.605 37.49,10.84 ; LED29.A@38.692,2.247 37.774,2.646 ; LED29.A@38.735,2.925 37.774,2.646 ; LED29.A@38.753,2.439 37.774,2.646 ; LED29.A@38.771,2.727 37.774,2.646 ; LED29.A@38.772,2.582 37.774,2.646 ; LED29.A@38.783,2.709 39.824,2.646 ; LED29.A@38.785,2.564 39.824,2.646 ; LED29.A@38.802,2.852 39.824,2.646 ; LED29.A@38.82,2.366 39.824,2.646 ; LED29.A@38.861,3.045 39.824,2.646 ; v1@39.195,10.468 39.573,10.09 58.894,10.09 59.06,9.924 ; LED28.K@41.521,7.061 41.86,6.122 ; LED28.K@41.716,7.11 41.86,6.122 ; LED28.K@42.004,7.11 41.86,6.122 ; LED28.K@42.199,7.061 41.86,6.122 ; LED31.A@42.462,-3.54 44.157,-3.54 44.458,-3.239 44.458,2.646 ; LED31.A@42.525,-3.54 43.57,-3.54 ; LED31.A@42.535,-3.684 43.57,-3.54 ; LED31.A@42.535,-3.396 43.57,-3.54 ; LED31.A@42.582,-3.88 43.57,-3.54 ; LED31.A@42.582,-3.2 43.57,-3.54 ; LED30.A@45.537,2.186 44.589,2.646 ; LED30.A@45.607,2.375 44.589,2.646 ; LED30.A@45.62,2.861 44.589,2.646 ; LED30.A@45.634,2.517 44.589,2.646 ; LED30.A@45.64,2.58 45.574,2.646 44.458,2.646 ; LED30.A@45.642,2.661 44.589,2.646 ; LED18.A@53.328,13.406 57.959,13.406 ; LED18.A@53.333,13.469 54.374,13.406 ; LED18.A@53.335,13.324 54.374,13.406 ; LED18.A@53.352,13.612 54.374,13.406 ; LED18.A@53.37,13.126 54.374,13.406 ; LED18.A@53.411,13.805 54.374,13.406 ; LED12.K@55.233,7.415 54.478,6.428 ; LED12.K@55.338,7.391 56.186,8.136 ; LED12.K@55.382,7.281 54.478,6.428 ; LED12.K@55.475,7.17 54.478,6.428 ; LED12.K@55.483,7.253 56.186,8.136 ; LED12.K@55.554,7.049 54.478,6.428 ; LED12.K@55.602,7.17 56.186,8.136 ; LED12.K@55.64,6.868 54.478,6.428 ; LED12.K@55.73,7.103 56.186,8.136 ; LED12.K@55.92,7.039 56.186,8.136 ; LED17.A@57.66,17.623 58,16.636 ; LED17.A@57.856,17.67 58,16.636 ; LED17.A@58,17.68 58,13.447 57.959,13.406 ; LED17.A@58.144,17.67 58,16.636 ; LED17.A@58.34,17.623 58,16.636 ; LED4.K@59.68,11.42 59.076,10.816 59.076,8.685 58.541,8.15 56.2,8.15 53.751,5.701 42.281,5.701 ; LED4.K@59.723,11.565 59.205,12.605 ; LED4.K@59.731,11.859 59.079,10.819 ; LED4.K@59.85,11.96 58.404,13.406 57.959,13.406 ; LED4.K@59.892,11.739 59.079,10.819 ; LED4.K@59.895,11.67 59.205,12.605 ; LED4.K@59.994,11.637 59.079,10.819 ; LED4.K@60.006,11.763 59.205,12.605 ; LED4.K@60.084,11.523 59.079,10.819 ; LED4.K@60.104,11.869 59.205,12.605 ; LED4.K@60.186,11.35 59.079,10.819 ; LED4.K@60.217,12.035 59.205,12.605 ; 28.518,7.983 28.518,8.931 ; 28.518,8.931 35,8.931 ; 35,8.931 35.409,8.931 ; 35,8.931 35,10.44 35.4,10.84 37.49,10.84 ; 37.774,2.646 LED29.A@38.778,2.646 42.3,2.646 ; 41.86,6.122 42.281,5.701 ; 41.86,6.122 LED28.K@41.86,7.12 41.86,6.122 ; 42.281,5.701 42.281,2.665 42.3,2.646 ; 42.3,2.646 44.458,2.646
  Bottom Layer w0.2: v1(8.94,7.07) 11.56,7.07 v1(11.61,7.12) 10.606,7.07 ; v1@8.96,6.871 9.942,7.07 v1@8.96,7.269 ; v1@11.58,7.318 10.606,7.07 ; v1@11.6,6.92 10.606,7.07
  Bottom Layer w0.22: v1@37.892,10.25 38.956,10.299 ; v1@37.892,10.63 38.981,10.58 ; v1@37.91,10.25 38.963,10.4 ; v1@37.916,10.251 v1@38.969,10.436 ; v1@37.918,10.629 v1@38.969,10.436 ; v1@37.924,10.628 38.963,10.4 ; v1@37.941,10.254 38.981,10.58 ; v1@37.942,10.625 38.956,10.299 ; v1@37.983,10.4 39.144,10.4 v1@39.325,10.581 ; v1@39.234,10.638 v1@38.196,10.4 ; v1@39.252,10.26 v1@38.196,10.4 ; v1(39.26,10.45) v1@38.196,10.4 ; v1(37.9,10.44) 38.963,10.4 ; v1(37.9,10.44) 38.956,10.299 ; v1(37.9,10.44) v1@38.969,10.436 ; v1(37.9,10.44) 38.981,10.58
PT24: LED5.K LED25.A LED26.A LED28.A LED29.K LED37.K LED38.A LED39.A LED45.K LED53.K U1.20 | length 252.6
  Top Layer w0.2: v1@7.971,-1.63 8.17,-2.612 v1@8.369,-1.63 ; v1(8.17,-1.61) 8.17,-3.57 7.55,-4.19 7.55,-15.51 8.715,-16.675 U1.20@12.74,-16.675 ; LED45.K@11.371,0.89 11.8,-0.078 ; 11.415,-16.675 U1.20@12.19,-16.675 ; LED45.K@11.562,0.954 11.8,-0.078 ; v1@11.601,-1.61 11.8,-2.592 ; v1@11.601,-1.57 11.8,-0.588 v1@11.999,-1.57 ; LED45.K@11.704,0.977 11.8,-0.078 ; LED45.K@11.71,1.04 11.8,0.95 11.8,-2.95 13.02,-4.17 24.96,-4.17 25.406,-3.724 25.406,0.904 LED37.K@25.29,1.02 28.675,1.02 ; v1(11.8,-1.59) 11.8,-2.592 ; LED45.K@11.849,0.98 11.8,-0.078 ; v1@11.999,-1.61 11.8,-2.592 ; LED45.K@12.048,0.952 11.8,-0.078 ; LED37.K@24.953,0.863 25.406,-0.104 ; LED37.K@25.142,0.931 25.406,-0.104 ; LED37.K@25.284,0.957 25.406,-0.104 ; LED37.K@25.296,1.083 26.336,1.02 ; LED37.K@25.297,0.939 26.336,1.02 ; LED37.K@25.314,1.227 26.336,1.02 ; LED37.K@25.332,0.741 26.336,1.02 ; LED37.K@25.373,1.419 26.336,1.02 ; LED37.K@25.429,0.963 25.406,-0.104 ; LED37.K@25.629,0.94 25.406,-0.104 ; LED39.A@28.629,-3.561 28.675,-2.391 ; LED39.A@28.675,-3.438 28.675,0.782 ; 28.675,0.99 28.675,0.782 ; 28.675,2.951 31.669,2.951 LED38.A@32.07,2.55 ; LED39.A@28.83,-3.552 28.675,-2.391 ; LED39.A@28.972,-3.524 28.675,-2.391 ; LED39.A@29.109,-3.479 28.675,-2.391 ; LED39.A@29.288,-3.389 28.675,-2.391 ; LED38.A@31.872,2.201 32.905,1.715 ; LED38.A@31.932,2.234 30.718,2.951 ; LED38.A@31.974,2.374 32.905,1.715 ; LED38.A@32.022,2.414 30.718,2.951 ; LED38.A@32.064,2.487 32.905,1.715 ; LED38.A@32.104,2.69 30.718,2.951 ; LED38.A@32.127,2.89 30.718,2.951 ; LED38.A@32.169,2.587 32.905,1.715 ; LED38.A@32.333,2.702 32.905,1.715 ; LED29.K@38.557,0.671 37.594,1.07 ; LED29.K@38.598,1.349 37.594,1.07 ; LED29.K@38.616,0.863 37.594,1.07 ; LED29.K@38.633,1.151 37.594,1.07 ; LED29.K@38.634,1.007 37.594,1.07 ; LED29.K@38.64,1.07 33.55,1.07 LED38.A@32.07,2.55 ; LED26.A@39.678,13.326 43.43,13.326 ; LED26.A@39.683,13.389 40.724,13.326 ; LED26.A@39.685,13.244 40.724,13.326 ; LED26.A@39.702,13.532 40.724,13.326 ; LED26.A@39.72,13.046 40.724,13.326 ; LED26.A@39.761,13.725 40.724,13.326 ; LED28.A@43.102,7.177 43.442,8.164 ; v1@43.171,11.82 43.37,12.802 ; v1@43.19,8.48 LED28.A@43.344,7.462 ; v1@43.191,8.508 LED28.A@43.195,7.447 ; v1@43.192,8.46 LED28.A@43.442,7.486 ; v1@43.196,8.442 LED28.A@43.535,7.495 ; v1@43.204,8.417 LED28.A@43.67,7.501 ; LED28.A@43.297,7.13 43.442,8.164 ; v1@43.361,11.6 44.392,11.654 ; v1@43.364,8.292 42.387,8.52 ; v1@43.376,8.69 42.387,8.52 ; v1@43.417,11.994 44.392,11.654 ; LED28.A@43.442,7.12 43.442,8.378 43.3,8.52 38.95,8.52 36.944,6.514 31.174,6.514 28.675,4.015 28.675,0.782 ; v1@43.569,11.82 43.37,12.802 ; v1@43.582,8.435 LED28.A@43.195,7.447 ; LED28.A@43.586,7.13 43.442,8.164 ; v1@43.587,8.525 LED28.A@43.67,7.501 ; v1@43.588,8.462 LED28.A@43.344,7.462 ; v1@43.59,8.48 LED28.A@43.442,7.486 ; v1@43.59,8.499 LED28.A@43.535,7.495 ; LED28.A@43.781,7.177 43.442,8.164 ; LED25.A@44,17.563 44.34,16.576 ; LED25.A@44.186,17.887 45.202,18.492 ; LED25.A@44.196,17.61 44.34,16.576 ; LED25.A@44.303,17.724 45.202,18.492 ; LED25.A@44.404,17.62 45.202,18.492 ; LED25.A@44.484,17.61 44.34,16.576 ; LED25.A@44.516,17.529 45.202,18.492 ; LED25.A@44.68,17.563 44.34,16.576 ; LED25.A@44.689,17.427 45.202,18.492 ; LED5.K@46.249,11.255 45.286,11.654 ; LED5.K@46.29,11.934 45.286,11.654 ; LED5.K@46.308,11.448 45.286,11.654 ; LED5.K@46.325,11.736 45.286,11.654 ; LED5.K@46.327,11.591 45.286,11.654 ; LED5.K@46.332,11.654 43.396,11.654 43.37,11.68 43.37,13.265 43.43,13.326 ; v1@55.27,19.101 54.288,19.3 ; v1@55.27,19.499 54.288,19.3 ; v1(55.29,19.3) 54.288,19.3 ; v1@55.307,19.3 46.01,19.3 44.34,17.63 LED25.A@44.34,17.62 ; v1@56.637,19.31 63.59,19.31 64.673,18.227 64.673,16.807 ; v1(56.74,19.3) 57.742,19.31 ; v1@56.758,19.499 57.742,19.31 ; v1@56.762,19.101 57.742,19.31 ; LED53.K@65.241,15.819 64.673,16.807 ; LED53.K@65.405,15.934 64.673,16.807 ; LED53.K@65.51,15.97 64.673,16.807 ; LED53.K@65.51,16.034 64.673,16.807 ; LED53.K@65.601,16.146 64.673,16.807 ; LED53.K@65.703,16.319 64.673,16.807 ; 30.718,2.951 LED38.A@32.07,2.55 ; 42.387,8.52 v1(43.39,8.49) ; LED28.A@43.195,7.447 v1(43.39,8.49) ; LED28.A@43.344,7.462 v1(43.39,8.49) ; 43.37,12.802 v1(43.37,11.8) 44.392,11.654 ; v1(43.39,8.49) LED28.A@43.442,7.486 ; v1(43.39,8.49) LED28.A@43.67,7.501 ; v1(43.39,8.49) LED28.A@43.535,7.495 ; 43.43,13.326 44.34,14.235 LED25.A@44.34,17.62 ; 44.34,16.576 LED25.A@44.34,17.62
  Bottom Layer w0.2: v1(8.17,-1.61) 11.78,-1.61 v1(11.8,-1.59) 10.798,-1.61 ; v1@8.19,-1.809 9.172,-1.61 v1@8.19,-1.411 ; v1@11.776,-1.391 10.798,-1.61 ; v1@11.784,-1.789 10.798,-1.61 ; v1@43.171,11.78 43.37,10.798 v1@43.569,11.78 ; v1@43.172,11.827 43.37,12.55 ; v1@43.191,8.506 43.37,9.492 ; v1@43.568,11.827 43.37,12.55 ; v1@43.589,8.514 43.37,9.492 ; v1(55.29,19.3) v1(56.74,19.3) ; v1@55.31,19.101 56.292,19.3 v1@55.31,19.499 ; v1@56.72,19.101 55.738,19.3 v1@56.72,19.499 ; 43.37,9.492 v1(43.39,8.49) 43.37,8.51 43.37,12.55
PT25: LED6.K LED14.K LED30.K LED33.A LED34.A LED36.A LED37.A LED38.K LED46.K LED47.A U1.21 | length 254.3
  Top Layer w0.2: v1(7.54,-0.75) 7.54,-3.38 7.14,-3.78 7.14,-16.06 8.39,-17.31 U1.21@12.74,-17.31 ; 11.415,-17.31 U1.21@12.19,-17.31 ; v1@13.11,-0.766 13.28,0.222 ; v1@13.16,-0.912 14.011,-1.73 ; v1@13.48,-0.675 14.011,-1.73 ; v1@13.508,-0.754 13.28,0.222 ; LED47.A@15.354,-3.615 14.833,-2.551 ; LED47.A@15.526,-3.512 14.833,-2.551 ; LED47.A@15.638,-3.42 14.833,-2.551 ; LED47.A@15.702,-3.42 13.28,-0.998 13.28,1.82 13.48,2.02 17.307,2.02 LED46.K@18.342,0.984 18.491,0.984 20.146,2.639 LED37.A@25.384,2.639 ; LED47.A@15.738,-3.315 14.833,-2.551 ; LED47.A@15.854,-3.152 14.833,-2.551 ; LED46.K@18.079,0.832 17.508,1.819 ; LED46.K@18.175,1.346 19.31,1.803 ; LED46.K@18.243,0.948 17.508,1.819 ; LED46.K@18.265,1.166 19.31,1.803 ; LED46.K@18.438,1.16 17.508,1.819 ; LED46.K@18.443,0.939 19.31,1.803 ; LED46.K@18.54,1.334 17.508,1.819 ; LED46.K@18.596,0.809 19.31,1.803 ; LED37.A@25.331,2.2 24.38,2.639 ; LED37.A@25.383,2.254 26.655,2.26 ; LED37.A@25.398,2.39 24.38,2.639 ; LED37.A@25.398,2.454 26.655,2.26 ; LED37.A@25.401,2.876 24.38,2.639 ; LED37.A@25.422,2.532 24.38,2.639 ; LED37.A@25.427,2.677 24.38,2.639 ; LED37.A@25.474,2.733 26.655,2.26 ; LED37.A@25.563,2.913 26.655,2.26 ; LED34.A@26.314,12.937 27.548,12.98 ; LED34.A@26.323,13.138 27.548,12.98 ; LED34.A@26.393,13.418 27.548,12.98 ; LED34.A@26.479,13.599 27.548,12.98 ; v1@27.691,2.324 27.91,3.302 ; v1@27.84,2.174 27.754,2.26 25.763,2.26 LED37.A@25.428,2.596 26.655,2.26 ; v1@27.862,2.498 26.886,2.26 ; v1@27.878,2.1 26.886,2.26 ; v1@27.91,2.37 27.91,4.48 30.41,6.98 36.71,6.98 38.58,8.85 38.58,12.11 37.35,13.34 v1@35.31,13.34 ; v1@28.089,2.316 27.91,3.302 ; v1@29.297,2.184 29.443,2.33 30.577,2.33 34.267,-1.36 43.581,-1.36 v1@43.674,-1.453 ; v1(29.42,2.32) 30.422,2.33 ; v1@29.438,2.519 30.422,2.33 ; v1@29.442,2.121 30.422,2.33 ; LED36.A@29.715,7.203 29.444,6.014 ; LED36.A@29.906,7.143 29.444,6.014 ; LED36.A@30.037,7.08 29.444,6.014 ; v1@30.037,13.498 30.96,14.09 ; LED36.A@30.158,7.002 29.444,6.014 ; LED36.A@30.16,6.936 31.228,6.98 ; v1(30.16,13.34) 30.96,14.09 ; LED36.A@30.164,7.08 31.228,6.98 ; LED36.A@30.187,6.736 31.228,6.98 ; LED36.A@30.187,7.223 31.228,6.98 ; LED36.A@30.251,7.413 31.228,6.98 ; v1@30.31,13.207 30.96,14.09 ; LED36.A@30.311,6.872 29.444,6.014 ; LED33.A@30.66,17.537 30.96,16.534 ; LED33.A@30.857,17.576 30.96,16.534 ; LED33.A@30.96,17.6 30.96,14.09 ; LED33.A@31.002,17.58 30.96,16.534 ; LED33.A@31.145,17.564 30.96,16.534 ; LED33.A@31.339,17.51 30.96,16.534 ; LED38.K@31.669,0.822 31.098,1.809 ; LED38.K@31.735,0.625 32.767,0.14 ; LED38.K@31.833,0.938 31.098,1.809 ; LED38.K@31.836,0.799 32.767,0.14 ; LED38.K@31.927,0.911 32.767,0.14 ; LED38.K@31.938,1.038 31.098,1.809 ; LED38.K@32.028,1.15 31.098,1.809 ; LED38.K@32.031,1.011 32.767,0.14 ; LED38.K@32.13,1.324 31.098,1.809 ; LED38.K@32.195,1.127 32.767,0.14 ; LED6.K@32.927,11.221 31.964,11.62 ; LED6.K@32.968,11.899 31.964,11.62 ; LED6.K@32.986,11.413 31.964,11.62 ; LED6.K@33.003,11.701 31.964,11.62 ; LED6.K@33.004,11.557 31.964,11.62 ; LED6.K@33.01,11.62 31.21,11.62 29.85,12.98 ; v1(35.32,13.32) 36.322,13.34 ; v1@35.336,13.519 36.322,13.34 ; v1@35.344,13.121 36.322,13.34 ; v1@43.674,-1.581 42.697,-1.36 ; v1@43.684,-1.184 42.697,-1.36 ; v1(43.699,-1.383) 42.697,-1.36 ; v1@44.962,-1.324 45.19,-0.347 ; LED30.K@45.154,0.981 45.19,-0.216 ; v1(45.16,-1.35) 45.19,-0.347 ; v1@45.334,-1.35 45.19,-1.206 45.19,0.692 LED30.K@45.502,1.004 52.192,1.004 LED14.K@52.302,1.114 ; LED30.K@45.355,0.97 45.19,-0.216 ; v1@45.36,-1.336 45.19,-0.347 ; LED30.K@45.497,0.941 45.19,-0.216 ; LED30.K@45.508,1.068 46.548,1.004 ; LED30.K@45.509,0.923 46.548,1.004 ; LED30.K@45.526,1.211 46.548,1.004 ; LED30.K@45.544,0.725 46.548,1.004 ; LED30.K@45.585,1.403 46.548,1.004 ; LED30.K@45.634,0.896 45.19,-0.216 ; LED30.K@45.813,0.806 45.19,-0.216 ; LED14.K@52.226,1.388 51.24,1.004 ; LED14.K@52.256,0.709 51.24,1.004 ; LED14.K@52.28,1.195 51.24,1.004 ; LED14.K@52.293,0.907 51.24,1.004 ; LED14.K@52.297,1.051 51.24,1.004 ; 13.28,0.222 v1(13.31,-0.78) 14.011,-1.73 ; 17.508,1.819 18.348,1.048 19.31,1.803 ; 26.886,2.26 v1(27.89,2.3) 27.91,3.302 ; 27.548,12.98 LED34.A@26.35,13.28 26.65,12.98 29.85,12.98 ; 29.85,12.98 30.96,14.09
  Bottom Layer w0.2: v1@7.39,-0.75 13.28,-0.75 v1(13.31,-0.78) 12.307,-0.75 ; v1(7.54,-0.75) 8.542,-0.75 ; v1@7.56,-0.949 8.542,-0.75 ; v1@7.56,-0.551 8.542,-0.75 ; v1@13.284,-0.978 12.307,-0.75 ; v1@13.296,-0.58 12.307,-0.75 ; v1@27.828,2.179 27.959,2.31 29.249,2.31 v1@29.39,2.169 ; v1(27.89,2.3) 28.892,2.31 ; v1@27.908,2.499 28.892,2.31 ; v1@27.912,2.101 28.892,2.31 ; v1@29.398,2.519 28.418,2.31 ; v1@29.402,2.121 28.418,2.31 ; v1(29.42,2.32) 28.418,2.31 ; v1(30.16,13.34) 31.162,13.34 ; v1@30.18,13.141 31.162,13.34 ; v1@30.18,13.539 31.162,13.34 ; v1@30.23,13.46 30.35,13.34 v1@35.29,13.34 ; v1@35.296,13.121 34.318,13.34 ; v1@35.304,13.519 34.318,13.34 ; v1(35.32,13.32) 34.318,13.34 ; v1(43.699,-1.383) v1@45.09,-1.383 ; v1@43.719,-1.582 44.701,-1.383 v1@43.719,-1.184 ; v1@45.134,-1.152 44.158,-1.383 ; v1@45.147,-1.55 44.158,-1.383 ; v1(45.16,-1.35) 44.158,-1.383